# Altium PCB Expansion_hv2.PcbDoc (part 2 of 2)
Units mm, origin at the board's own origin, x right, y up, seen from the top; angles counter-clockwise.
Board outline 43 x 71 mm, 2 copper layers (Top Layer, Bottom Layer); 137 components, 76 nets, 388 pads, 241 vias.
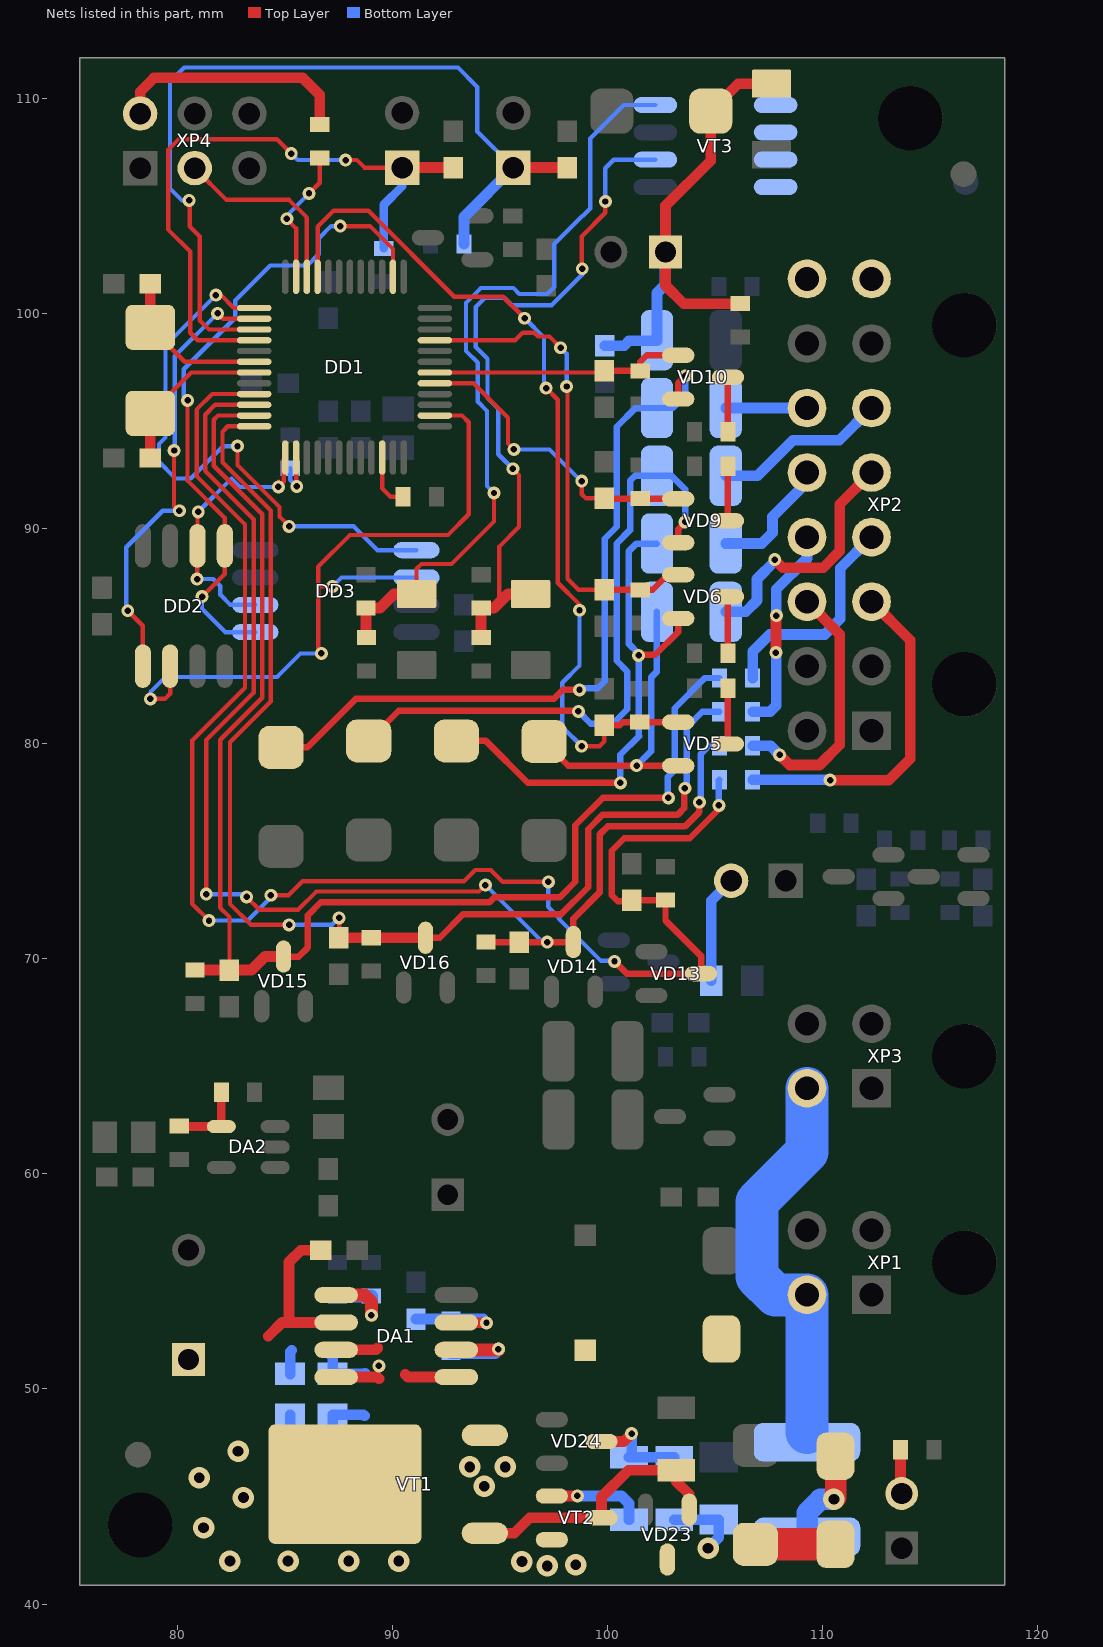
[diagram p2: the nets of this part, all layers, seen from the top]

## Via types
v1: diameter 0.6, hole 0.3, Top Layer to Bottom Layer, 220 vias
v2: diameter 1, hole 0.5, Top Layer to Bottom Layer, 21 vias

## Nets (pads, with @x,y where several pads share a name; then routed paths per layer and width w, separated by ;. In a path a pad name is that pad's centre, name@x,y a point inside that pad or via, vN(x,y) a via of type N, cw(c..) or ccw(c..) an arc to the next point about the centre after c; other vN are vias at no path point) (continued)
INP0_1: FU4.1 XP2.5 | length 11.7
  Top Layer w0.5: v1(107.775,88.55) 108.15,88.175 110.025,88.175 110.8,88.95 110.8,91.125 XP2.5@112.275,92.6
  Bottom Layer w0.5: FU4.1@105.5,86.125 106.425,86.125 106.95,86.65 106.95,87.65 107.775,88.475 v1(107.775,88.55)
INP0_1HF: C4.2 DD1.45 R6.2 VD5.1 | length 41.4
  Top Layer w0.2: DD1.45@86.525,101.7 86.525,104.025 87.275,104.775 88.875,104.775 92.875,100.775 95.15,100.775 v1(96.15,99.775) ; v1(97.15,96.525) 97.69,95.985 97.69,87.474 98.7,86.464 v1(98.7,86.2) ; v1(98.8,79.875) 99.625,79.875 99.85,80.1 C4.2@99.85,80.85
  Top Layer w0.3: C4.2@99.85,80.85 100.575,80.85 100.726,81.001 R6.2@101.5,81.001 ; R6.2@101.5,81.001 VD5.1@103.288,81
  Bottom Layer w0.2: v1(96.15,99.775) 97.05,98.875 97.05,96.625 v1(97.15,96.525) ; v1(98.7,86.2) 98.7,83.625 97.9,82.825 97.9,80.775 v1(98.8,79.875)
INP0_2: FU5.1 XP2.13 | length 5.8
  Bottom Layer w0.5: FU5.1@105.5,89.3 107.175,89.3 107.675,89.8 107.675,90.55 109.275,92.15 XP2.13@109.275,92.6
INP0_2HF: C5.2 DD1.33 R7.2 VD6.1 | length 22.8
  Top Layer w0.2: DD1.33@91.975,98.75 95.706,98.75 96.056,99.1 96.594,99.1 96.769,98.925 97.3,98.925 v1(97.825,98.4) ; v1(98.1,96.6) 98.14,96.56 98.14,87.66 98.65,87.15 C5.2@100.05,87.15
  Top Layer w0.3: C5.2@100.05,87.15 102.1,87.15 102.8,87.85 VD6.1@103.288,87.85
  Bottom Layer w0.2: v1(97.825,98.4) 98.1,98.125 v1(98.1,96.6)
INP0_3: FU6.1 XP2.6 | length 8.1
  Bottom Layer w0.5: FU6.1@105.5,92.45 106.975,92.45 108.625,94.1 110.775,94.1 XP2.6@112.275,95.6
INP0_3F: C6.2 DD1.29 R10.2 VD9.1 | length 14.6
  Top Layer w0.2: DD1.29@91.975,96.75 93.775,96.75 95.375,95.15 95.375,93.95 v1(95.65,93.675) ; v1(98.805,92.204) 98.805,91.595 99,91.4 C6.2@99.848,91.4
  Top Layer w0.3: C6.2@99.848,91.4 99.873,91.375 VD9.1@103.288,91.375
  Bottom Layer w0.2: v1(95.65,93.675) 97.3,93.675 98.771,92.204 v1(98.805,92.204)
INP0_4: FU7.1 XP2.14 | length 3.8
  Bottom Layer w0.5: FU7.1@105.5,95.6 XP2.14@109.275,95.6
INP0_4F: C7.2 DD1.30 R11.2 VD10.1 | length 11.9
  Top Layer w0.2: DD1.30@91.975,97.25 99.775,97.25 C7.2@99.85,97.325
  Top Layer w0.3: C7.2@99.85,97.325 R11.2@101.525,97.324 101.524,97.749 101.825,98.05 VD10.1@103.288,98.05
INP1_1: R12.1 XP2.3 | length 15.8
  Top Layer w0.5: v1(110.35,78.3) 113.075,78.3 114.075,79.3 114.075,84.8 XP2.3@112.275,86.6
  Bottom Layer w0.5: R12.1@106.75,78.325 110.325,78.325 v1(110.35,78.3)
INP1_1HF: C8.2 DD1.9 R12.2 R14.2 VD13.3 | length 71.6
  Top Layer w0.2: v1(81.475,71.775) 80.7,72.55 80.7,80.15 83.15,82.6 83.15,90.191 80.9,92.441 80.9,95.525 81.625,96.25 DD1.9@83.575,96.25 ; v1(84.35,72.95) 85.175,72.95 85.825,73.6 93.325,73.6 93.85,74.125 94.575,74.125 95.125,73.575 v1(97.25,73.575)
  Top Layer w0.3: v1(100.325,69.875) 100.891,69.309 VD13.3@104.349,69.309 104.349,70.126 102.696,71.779 R14.2@102.696,72.726 C8.2@101.121,72.725 ; C8.2@101.121,72.725 101.071,72.675 100.475,72.675 100.2,72.95 100.2,75.02 100.78,75.6 103.828,75.6 105.175,76.947 v1(105.175,77.125)
  Bottom Layer w0.2: v1(81.475,71.775) 83.275,71.775 84.35,72.85 v1(84.35,72.95) ; v1(97.25,73.575) 97.25,72.41 97.755,71.905 97.725,71.875 99.7,69.9 100.3,69.9 v1(100.325,69.875)
  Bottom Layer w0.3: v1(105.175,77.125) 105.175,78.299 R12.2@105.201,78.325
INP1_2: R13.1 XP2.11 | length 12.1
  Top Layer w0.5: v1(108,79.475) 108.475,79 109.85,79 110.8,79.95 110.8,85.075 XP2.11@109.275,86.6
  Bottom Layer w0.5: R13.1@106.75,79.9 107.575,79.9 v1(108,79.475)
INP1_2HF: C9.2 DD1.10 R13.2 R15.2 VD14.3 | length 62.7
  Top Layer w0.2: v1(81.35,73) 81.35,80.164 83.55,82.364 83.55,90.427 81.3,92.677 81.3,95.289 81.761,95.75 DD1.10@83.575,95.75 ; v1(83.225,72.875) 83.825,72.275 85.618,72.275 86.468,73.125 94.025,73.125 v1(94.325,73.425)
  Top Layer w0.3: R15.2@94.35,70.774 VD14.3@98.416,70.774 98.416,71.863 99.65,73.097 99.65,75.794 100.006,76.15 103.6,76.15 104.275,76.825 v1(104.275,77.275)
  Bottom Layer w0.2: v1(81.35,73) 83.1,73 v1(83.225,72.875) ; v1(94.325,73.425) 96.975,70.775 v1(97.2,70.775)
  Bottom Layer w0.3: v1(104.275,77.275) 104.325,77.325 104.325,79.5 104.725,79.9 R13.2@105.201,79.9
INP1_3: R16.1 XP2.4 | length 10.3
  Bottom Layer w0.5: R16.1@106.75,83.05 106.75,84.28 107.545,85.075 110.1,85.075 110.825,85.8 110.825,88.15 XP2.4@112.275,89.6
INP1_3F: C10.2 DD1.11 R16.2 R18.2 VD15.3 | length 64.2
  Top Layer w0.2: C10.2@82.425,69.475 82.424,71.939 82,72.364 82,80.177 83.95,82.127 83.95,90.664 81.7,92.914 81.7,95.052 81.898,95.25 DD1.11@83.575,95.25
  Top Layer w0.3: VD15.3@84.941,70.099 85.649,70.099 86.075,70.525 86.075,72.025 86.675,72.625 94.515,72.625 94.74,72.85 97.775,72.85 98.5,73.575 98.5,76.2 99.775,77.475 102.826,77.475 v1(102.83,77.479)
  Top Layer w0.5: R18.2@80.825,69.474 C10.2@82.425,69.475 ; C10.2@82.425,69.475 83.45,69.475 84.074,70.099 VD15.3@84.941,70.099
  Bottom Layer w0.3: v1(102.83,77.479) 102.8,77.509 102.8,78.45 103.125,78.775 103.125,81.65 104.525,83.05 R16.2@105.201,83.05
INP1_4: R17.1 XP2.12 | length 9.7
  Top Layer w0.5: v1(107.83,84.229) 107.83,85.93 v1(107.85,85.95)
  Bottom Layer w0.5: R17.1@106.75,81.475 107.55,81.475 107.85,81.775 107.85,84.209 v1(107.83,84.229) ; v1(107.85,85.95) 107.85,87.175 109.275,88.6 XP2.12@109.275,89.6
INP1_4F: C11.2 DD1.12 R17.2 R19.2 VD16.3 | length 57.6
  Top Layer w0.2: DD1.12@83.575,94.75 82.35,94.75 82.1,94.5 82.1,93.079 84.35,90.829 84.35,81.962 82.45,80.062 82.45,72.55 83.425,71.575 v1(85.2,71.575) ; C11.2@87.5,70.975 87.525,71 v1(87.525,71.9)
  Top Layer w0.3: VD16.3@91.541,70.974 92.199,70.974 93.3,72.075 97.85,72.075 99.1,73.325 99.1,76.022 99.778,76.7 103.274,76.7 103.575,77.001 103.575,77.9 v1(103.6,77.925)
  Top Layer w0.5: C11.2@87.5,70.975 R19.2@89.025,70.974 ; R19.2@89.025,70.974 VD16.3@91.541,70.974
  Bottom Layer w0.2: v1(85.2,71.575) 87.2,71.575 v1(87.525,71.9)
  Bottom Layer w0.3: v1(103.6,77.925) 103.675,78 103.675,80.75 104.4,81.475 R17.2@105.201,81.475
ISP_START: C24.2 DD1.4 J2.1 R31.2 | length 30.4
  Top Layer w0.2: DD1.4@83.575,98.75 80.95,98.75 80.6,99.1 80.6,102.875 79.575,103.9 79.575,107.6 80.075,108.1 84.625,108.1 v1(85.3,107.425) ; v1(87.825,107.125) 88.35,107.125 88.7,106.775 J2.1@90.45,106.775
  Top Layer w0.5: J2.1@90.45,106.775 C24.2@92.825,106.775
  Bottom Layer w0.2: v1(85.3,107.425) 85.6,107.125 v1(87.825,107.125)
  Bottom Layer w0.4: R31.2@89.6,103.024 89.6,105.05 90.45,105.9 J2.1@90.45,106.775
  Bottom Layer w0.5: J2.1@90.45,106.775 J2.1@90.599,106.924
MISO: DD1.26 DD2.2 DD3.2 | length 34.2
  Top Layer w0.2: v1(78.754,82.079) 79.429,82.079 79.67,82.32 DD2.2@79.67,83.6 DD2.2@79.65,83.62 ; v1(86.7,84.19) 86.55,84.34 86.55,87.3 ; v1(87.213,87.3) 86.55,87.3 ; DD1.26@91.975,95.25 93.236,95.25 93.55,94.936 93.55,90.664 92.586,89.7 88.025,89.7 86.55,88.225 86.55,87.3
  Bottom Layer w0.2: v1(78.754,82.079) 78.754,82.404 79.45,83.1 84.644,83.1 85.733,84.19 v1(86.7,84.19) ; v1(87.213,87.3) 87.633,87.72 DD3.2@91.118,87.72
MOSI: DD1.38 DD2.5 DD3.5 | length 30.4
  Top Layer w0.2: v1(80.479,95.955) 80.479,92.225 82.21,90.494 DD2.5@82.21,89.188 82.21,87.885 v1(81.154,86.829) ; v1(87.579,104.055) 88.959,104.055 90.025,102.989 DD1.38@90.025,101.7
  Bottom Layer w0.2: v1(80.479,95.955) 80.3,96.134 80.3,97.4 82.7,99.8 82.7,100.6 84.325,102.225 86.05,102.225 86.575,102.75 86.575,103.476 87.154,104.055 v1(87.579,104.055) ; v1(81.154,86.829) 81.154,86.271 82.245,85.18 DD3.5@83.625,85.18
NetC2_2: C2.2 C3.1 FU1.2 R3.1 VD2.2 VD3.2 | length 23
  Top Layer w0.5: R3.1@106.175,100.45 103.55,100.45 102.7,101.3 C3.1@102.7,102.85 102.7,105 104.8,107.1 VD3.2@104.8,109.4 106.076,110.676 VD2.2@107.625,110.676
  Bottom Layer w0.5: C2.2@99.875,98.5 100.775,98.5 101,98.725 102.3,98.725 FU1.2@102.3,98.75 102.3,100.95 102.675,101.325 102.675,102.825 C3.1@102.7,102.85
NetC25_2: C25.2 R32.2 VD21.2 VD22.2 VD23.3 VT1.3 VT2.2 | length 7.3
  Top Layer w1.5: VD22.2@106.875,42.775 VD21.2@110.6,42.775
  Bottom Layer w0.5: R32.2@103.1,43.925 C25.2@105.175,43.925 105.175,43.1 v2(104.675,42.6)
  other v2: 97.2,41.775 98.525,41.825 96.025,41.975 94.275,45.475 93.6,46.375 95.25,46.375
NetC30_2: C30.2 DA1.3 R37.2 | length 4.9
  Top Layer w0.5: DA1.3@92.975,53.09 92.99,53.075 v1(94.375,53.075)
  Bottom Layer w0.5: C30.2@91.1,53.25 R37.2@92.724,53.25 ; R37.2@92.725,53.249 94.226,53.249 94.175,53.199 94.299,53.075 v1(94.375,53.075)
NetDA1_1: DA1.1 DA1.7 DA1.8 R35.1 R36.1 | length 10
  Top Layer w0.5: DA1.8@87.387,50.55 89.3,50.55 89.375,50.475 ; DA1.7@87.387,51.82 89.244,51.82 89.324,51.9 ; 90.6,50.675 90.725,50.55 DA1.1@92.975,50.55
  Bottom Layer w0.5: R36.1@85.25,50.7 85.25,51.725 85.325,51.8 ; 87.15,51.575 87.225,51.5 R35.1@87.225,50.7 88.7,50.7 88.725,50.725
  other v1: 89.375,51.075
NetDA1_2: DA1.2 L1.2 R37.1 VD25.2 | length 4.2
  Top Layer w0.6: DA1.2@92.975,51.82 v1@94.925,51.82
  Bottom Layer w0.6: R37.1@92.725,51.7 94.775,51.7 v1(94.925,51.85)
NetDA1_5: DA1.5 R38.2 R39.2 | length 4.9
  Top Layer w0.6: DA1.5@87.387,54.36 88.715,54.36 89.025,54.05 v1(89.025,53.425)
  Bottom Layer w0.6: R38.2@87.45,54.326 R39.2@89.025,54.326 v1(89.025,53.425)
NetDA2_4: DA2.4 R40.1 R41.2 | length 3.6
  Top Layer w0.4: R40.1@80.1,62.225 80.125,62.2 DA2.4@82.05,62.2 R41.2@82.051,63.8
NetDD1_14: DD1.14 R28.2 | length 2.5
  Top Layer w0.2: DD1.14@85.525,93.3 85.525,91.984 v1(85.554,91.954)
  Bottom Layer w0.2: R28.2@85.25,92.801 85.25,92.259 v1(85.554,91.954) v1@85.554,91.763
NetDD1_22: DD1.22 R29.2 | length 2.6
  Top Layer w0.2: DD1.22@89.525,93.3 89.525,91.869 89.919,91.475 R29.2@90.501,91.475
NetFU4_2: FU4.2 VD5.2 VD7.2 | length 14.3
  Top Layer w0.3: VD7.2@97.05,80.1 98.175,78.975 v1(101.35,78.975) 103.281,78.975 VD5.2@103.288,78.968
  Bottom Layer w0.3: v1(101.35,78.975) 102.025,79.65 102.025,80.225 102.025,83.075 102.3,83.35 FU4.2@102.3,86.125
NetFU5_2: FU5.2 VD6.2 VD8.2 | length 24.1
  Top Layer w0.3: VD8.2@92.975,80.125 94.35,80.125 96.3,78.175 v1(100.6,78.175) ; v1(101.45,84.1) 101.475,84.125 102.225,84.125 103.288,85.188 VD6.2@103.288,85.818
  Bottom Layer w0.3: v1(100.6,78.175) 100.6,79.475 101.475,80.35 101.45,80.375 v1(101.45,84.1) 101.45,84.18 100.98,84.65 100.98,88.93 101.35,89.3 FU5.2@102.3,89.3
NetFU6_2: FU6.2 VD9.2 VD11.2 | length 29.7
  Top Layer w0.3: VD11.2@88.9,80.125 90.3,81.525 98.625,81.525 v1(98.65,81.5) ; VD9.2@103.288,89.343 103.288,89.963 103.605,90.28 v1(103.605,90.304)
  Bottom Layer w0.3: v1(98.65,81.5) 99.225,80.925 100.25,80.925 100.925,81.6 100.925,83.35 100.425,83.85 100.425,89.3 101.05,89.925 101.05,92.225 101.275,92.45 FU6.2@102.3,92.45 102.975,92.45 103.605,91.82 v1(103.605,90.304)
NetFU7_2: FU7.2 VD10.2 VD12.2 | length 34.3
  Top Layer w0.3: VD12.2@84.825,79.825 86.05,79.825 88.3,82.075 97.5,82.075 97.925,82.5 v1(98.7,82.5) ; VD10.2@103.288,96.018 103.288,96.763 v1(103.625,97.1)
  Bottom Layer w0.3: v1(98.7,82.5) 98.775,82.575 99.55,82.575 99.875,82.9 99.875,89.528 100.425,90.078 100.425,94.725 101.3,95.6 FU7.2@102.3,95.6 103.025,95.6 103.625,96.2 v1(103.625,97.1)
NetFU8_2: FU8.2 VD21.1 | length 4.7
  Top Layer w1: v2(110.525,44.875) 110.6,44.95 VD21.1@110.6,46.875
  Bottom Layer w1: FU8.2@109.275,43.125 109.275,44.25 109.9,44.875 v2(110.525,44.875)
NetJ3_2: J3.2 R46.1 | length 5
  Bottom Layer w0.5: R46.1@104.825,68.975 104.825,72.7 J3.2@105.75,73.625
NetR4_1: R4.1 VD5.3 | length 2.6
  Top Layer w0.3: VD5.3@105.599,79.984 105.6,79.985 R4.1@105.6,82.575
NetR5_1: R5.1 VD6.3 | length 2.6
  Top Layer w0.3: VD6.3@105.599,86.834 105.599,84.201 R5.1@105.6,84.2
NetR8_1: R8.1 VD9.3 | length 2.5
  Top Layer w0.3: VD9.3@105.599,90.359 105.6,90.36 R8.1@105.6,92.9
NetR9_1: R9.1 VD10.3 | length 2.5
  Top Layer w0.3: VD10.3@105.599,97.034 105.6,97.033 R9.1@105.6,94.5
NetR26_2: R26.2 VD20.2 | length 2.1
  Top Layer w0.5: R26.2@113.626,47.175 113.626,45.189 VD20.2@113.675,45.14
NetR27_2: R27.2 XP4.2 | length 11.3
  Top Layer w0.5: XP4.2@78.275,109.29 78.275,110.3 78.925,110.95 85.825,110.95 86.625,110.15 R27.2@86.625,108.774
NetR32_1: R32.1 R33.1 VD24.3 | length 4.8
  Top Layer w0.5: VD24.3@99.724,47.559 100.759,47.559 v1(101.125,47.925)
  Bottom Layer w0.5: v1(101.125,47.925) 101.125,46.95 R33.1@101,46.825 R32.1@103.1,46.825
NetR33_2: R33.2 VT2.1 | length 4.5
  Top Layer w0.5: VT2.1@97.413,45.025 v1(98.6,45.025)
  Bottom Layer w0.5: v1(98.6,45.025) 100.65,45.025 101,44.675 R33.2@101,43.925
NetR34_1: R34.1 VD23.1 VT1.1 VT2.3 | length 12.8
  Top Layer w0.5: VT1.1@94.3,43.295 95.67,43.295 96.384,44.009 VT2.3@99.724,44.009 99.724,44.974 100.975,46.225 R34.1@103.2,46.225 103.2,45.7 103.8,45.1 VD23.1@103.8,44.387
NetR42_2: R42.2 R45.2 VD27.2 VT3.2 | length 32.5
  Top Layer w0.2: 95.1,86.675 94.975,86.8 94.975,89.161 95.89,90.076 95.89,92.485 v1(95.6,92.775) ; v1(98.825,102.075) 98.8,102.1 98.8,103.575 99.9,104.675 v1(99.9,105.2)
  Top Layer w0.5: R45.2@94.125,85.024 R42.2@94.125,86.301 94.726,86.301 95.1,86.675 95.376,86.951 VD27.2@96.425,86.951
  Bottom Layer w0.2: v1(95.6,92.775) 94.925,93.45 94.925,95.575 94.425,96.075 94.425,97.889 93.875,98.439 93.875,100.3 94.3,100.725 95.2,100.725 95.55,100.375 97.4,100.375 98.825,101.8 v1(98.825,102.075) ; v1(99.9,105.2) 99.9,106.75 100.295,107.145 VT3.2@102.225,107.145
NetR43_2: R43.2 R44.2 VD26.2 VT3.4 | length 36.3
  Top Layer w0.2: VD26.2@91.125,86.951 91.125,88.125 91.35,88.35 92.75,88.35 94.725,90.325 v1(94.725,91.65)
  Top Layer w0.5: R44.2@88.8,84.924 88.775,84.949 R43.2@88.775,86.301 89.426,86.301 90.076,86.951 VD26.2@91.125,86.951
  Bottom Layer w0.2: v1(94.725,91.65) 94.4,91.975 94.4,95.464 93.975,95.889 93.975,97.702 93.425,98.252 93.425,100.486 94.114,101.175 95.625,101.175 95.9,100.9 97.2,100.9 97.525,101.225 97.525,103.225 98.825,104.525 98.85,104.525 99.2,104.875 99.2,108.125 100.76,109.685 VT3.4@102.225,109.685
PWM_CH1: VT3.5 VT3.6 XP2.8
PWM_CH2: VT3.7 VT3.8 XP2.16
RESET: C20.2 DD1.3 J1.1 R30.2 | length 40.9
  Top Layer w0.2: v1(80.55,105.25) 80.575,105.225 80.575,104.05 81.05,103.575 81.05,99.675 81.475,99.25 DD1.3@83.575,99.25
  Top Layer w0.5: J1.1@95.625,106.775 C20.2@98.125,106.775
  Bottom Layer w0.2: v1(80.55,105.25) 80.225,105.25 79.665,105.81 79.665,110.765 80.325,111.425 93.05,111.425 93.95,110.525 93.95,108.45 J1.1@95.625,106.775
  Bottom Layer w0.5: R30.2@93.324,103.225 93.324,104.474 J1.1@95.625,106.775
RXD0: DD1.46 XP4.3 | length 8.9
  Top Layer w0.2: XP4.3@80.815,106.75 82.29,105.275 85.2,105.275 86.025,104.45 DD1.46@86.025,101.7
SCK: DD1.13 DD2.6 DD3.6 | length 12.9
  Top Layer w0.2: v1(80.925,87.65) 80.925,89.36 80.94,89.375 80.94,90.74 v1(80.975,90.775) ; v1@84.704,92.179 v1(84.704,91.929) 84.954,92.18 84.954,93.229 DD1.13@85.025,93.3
  Bottom Layer w0.2: v1(80.925,87.65) 81.675,87.65 82,87.325 82,86.925 82.475,86.45 DD3.6@83.625,86.45 ; v1(80.975,90.775) 82.525,92.325 82.921,91.929 v1(84.704,91.929)
SS0: DD1.2 DD2.1 | length 20.9
  Top Layer w0.2: v1(77.7,86.175) 78.4,85.475 DD2.1@78.4,83.6 ; v1(79.85,93.625) 79.85,91.025 v1@80.05,90.825 ; v1(81.875,100) 82.125,99.75 DD1.2@83.575,99.75
  Bottom Layer w0.2: v1(77.7,86.175) 77.625,86.25 77.625,89.125 79.325,90.825 v1(80.1,90.825) ; v1(79.85,93.625) 79.879,93.654 79.879,98.004 v1(81.875,100)
SS1: DD1.1 DD3.1 | length 26.6
  Top Layer w0.2: v1(81.8,100.85) 81.825,100.825 82.05,100.825 82.625,100.25 DD1.1@83.575,100.25 ; v1(82.8,93.825) 82.8,92.945 84.75,90.995 84.75,90.55 v1(85.2,90.1)
  Bottom Layer w0.2: v1(81.8,100.85) 79.45,98.5 79.45,94.225 79.15,93.925 79.15,93.1 79.925,92.325 80.625,92.325 82.125,93.825 v1(82.8,93.825) ; v1(85.2,90.1) 88.2,90.1 89.31,88.99 DD3.1@91.118,88.99
TXD0: DD1.47 R27.1 | length 6.3
  Top Layer w0.2: v1(85.1,104.4) 85.1,104.375 85.525,103.95 DD1.47@85.525,101.7 ; v1(86.125,105.575) 86.625,106.075 R27.1@86.625,107.225
  Bottom Layer w0.2: v1(85.1,104.4) 85.1,104.55 v1(86.125,105.575)
VIN: FU8.1 XP1.3 XP3.3 | length 18.8
  Bottom Layer w2: FU8.1@109.275,47.975 XP1.3@109.275,54.375 107.8,54.375 106.95,55.225 106.95,58.7 109.275,61.025 XP3.3@109.275,63.975
VIN_F: C26.2 C27.2 DA1.6 R35.2 R36.2 VT1.2 | length 12
  Top Layer w0.5: 84.225,52.45 84.865,53.09 85.2,53.09 ; C26.2@86.675,56.45 85.75,56.45 85.2,55.9 85.2,53.09 ; DA1.6@87.387,53.09 85.2,53.09
  Bottom Layer w0.5: R36.2@85.25,48.8 85.25,47.75 85.325,47.675 ; 87.15,47.425 87.225,47.5 R35.2@87.225,48.8 88.65,48.8 88.7,48.75
  other v2: 82.45,42 85.15,42 87.975,42 90.3,42 81.225,43.55 83.075,44.95 81.025,45.875 82.825,47.1
XTALIN: C22.2 DD1.6 QR1.1 | length 7.5
  Top Layer w0.2: QR1.1@78.75,99.35 80.35,97.75 DD1.6@83.575,97.75
  Top Layer w0.5: QR1.1@78.75,99.35 C22.2@78.75,101.375
XTALOUT: C23.2 DD1.7 QR1.2 | length 7.7
  Top Layer w0.2: QR1.2@78.75,95.35 80.65,97.25 DD1.7@83.575,97.25
  Top Layer w0.5: C23.2@78.75,93.275 QR1.2@78.75,95.35
pads on no net: DD1.15 DD1.16 DD1.23 DD1.24 DD1.36 DD1.37 DD1.39 DD1.40 DD1.42 DD1.43 DD1.48 REP1.1 REP2.1 REP3.1 REP4.1 VD23.2 VD24.2 XP1.5 XP2.17 XP2.18 XP3.5 XP4.1 XP4.4 XP4.6

## Polygon pours and split planes (outlines as drawn)
GND on Top Layer "GND_L01_P044" (hatched 90Degree grid 0.15 track 0.2, remove dead copper, pour order 44): 75.475,111.875 118.475,111.875 118.475,40.875 75.475,40.875
+3V3 on Top Layer "+3V3_L01_P042" (hatched 90Degree grid 0.15 track 0.2, remove dead copper, pour order 42): 75.475,86.4 75.475,88.75 77.3,90.575 78.625,90.575 79.775,90.575 80.075,90.275 80.275,90.075 80.275,88.9 80.275,88 79.9,87.625 79.475,87.2 78.45,87.2 77.875,87.2 77.55,86.875 77.075,86.4 76.575,86.4
NetC25_2 on Top Layer "NETC25_2_L01_P014" (hatched 90Degree grid 0.15 track 0.2, remove dead copper, pour order 14): 110.75,44.05 105.5,44.05 105.15,43.7 104.675,43.225 103.225,43.225 99.125,43.225 98.775,43.575 98.6,43.75 96.775,43.75 96.325,43.75 95.95,43.375 95.4,42.825 95.4,41.65 95.4,40.875 111.9,40.875 111.9,43.675 111.525,44.05
NetC25_2 on Top Layer "NETC25_2_L01_P018" (hatched 90Degree grid 0.15 track 0.2, remove dead copper, pour order 18): 92.85,49.225 92.85,46.05 93.325,45.575 94,44.9 95.1,44.9 95.875,44.9 96.1,45.125 96.1,46.2 96.1,48.675 95.55,49.225
VIN_F on Top Layer "VIN_F_L01_P020" (hatched 90Degree grid 0.15 track 0.2, remove dead copper, pour order 20): 91.525,49.2 84.475,49.2 84.475,49.375 84.475,49.525 84.475,50.25 84.475,52.8 81.65,52.8 81.475,52.975 80.375,52.975 75.475,52.975 75.475,40.875 91.525,40.875
NetDA1_1 on Top Layer "NETDA1_1_L01_P028" (hatched 90Degree grid 0.15 track 0.2, remove dead copper, pour order 28): 88.7,52.4 86.125,52.4 86.075,52.4 85.625,51.95 85.425,51.75 85.425,50.775 85.425,50.025 85.75,49.7 85.825,49.625 88,49.625 89.425,49.625 90.95,49.625 91.45,50.125 91.65,50.325 91.65,51 91.65,51.175 91.45,51.375 91.125,51.7 90.425,51.7 90.1,51.7 89.85,51.95 89.4,52.4 89.275,52.4
NetDA1_2 on Top Layer "NETDA1_2_L01_P030" (hatched 90Degree grid 0.15 track 0.2, remove dead copper, pour order 30): 95.4,53.25 103.775,53.25 104.175,53.65 104.4,53.875 105.85,53.875 106.4,53.875 106.675,53.6 106.675,51.5 106.675,50.75 106.45,50.525 106.2,50.275 103.875,50.275 102.05,50.275 101.55,49.775 101.275,49.5 97.4,49.5 95.55,49.5 95.2,49.85 94.525,50.525 94.525,51.35 94.525,52.2 94.725,52.4 94.975,52.65 94.975,53.075 94.975,53.175 95.05,53.25
+5V on Top Layer "+5V_L01_P032" (hatched 90Degree grid 0.15 track 0.2, remove dead copper, pour order 32): 96.75,55.8 101.375,55.8 102.425,55.8 103.025,56.4 103.575,56.95 103.575,59.125 103.575,59.475 103.325,59.725 103.1,59.95 102.15,59.95 94.55,59.95 94.225,60.275 94.05,60.45 92.6,60.45 91.725,60.45 91.05,59.775 90.6,59.325 90.6,58.35 90.6,57.425 91,57.025 93.15,57.025 94.35,57.025 95.575,55.8 95.9,55.8
+5V on Top Layer "+5V_L01_P034" (hatched 90Degree grid 0.15 track 0.2, remove dead copper, pour order 34): 90.6,57.425 88.475,59.55 88.425,59.6 86.6,59.6 86.05,59.6 85.925,59.725 85.65,60 85.65,60.65 85.65,62.5 85.875,62.725 86.15,63 87.125,63 88.3,63 88.575,62.725 89.225,62.075 89.225,61.2 89.225,61.05 89.625,60.65 89.825,60.45 91.725,60.45
+3V3 on Top Layer "+3V3_L01_P036" (hatched 90Degree grid 0.15 track 0.2, remove dead copper, pour order 36): 81.875,61.075 81.325,61.075 81.075,61.325 80.975,61.425 80.225,61.425 79.475,61.425 79.35,61.55 79.325,61.575 79.325,62.325 79.325,62.475 79.175,62.625 79.15,62.65 78.375,62.65 77.9,62.65 77.7,62.45 77.525,62.275 77.525,60.725 77.525,58.775 77.925,58.375 78.025,58.275 79.575,58.275 81.7,58.275 82.675,59.25 83,59.575 83,60.35 83,60.775 82.7,61.075
GND on Bottom Layer "GND_L02_P046" (hatched 90Degree grid 0.15 track 0.2, remove dead copper, pour order 46): 75.475,111.875 118.475,111.875 118.475,40.875 75.475,40.875
NetC25_2 on Bottom Layer "NETC25_2_L02_P016" (hatched 90Degree grid 0.15 track 0.2, remove dead copper, pour order 16): 99.15,40.875 95.4,40.875 94.875,40.875 94.225,41.525 93.95,41.8 93.95,44.5 93.95,44.95 93.625,45.275 93.1,45.8 93.1,47.425 93.1,48.5 93.475,48.875 93.625,49.025 95.475,49.025 95.65,49.025 95.925,48.75 96.05,48.625 96.05,47.425 96.05,44.15 96.525,43.675 97,43.2 98.025,43.2 98.85,43.2 99.3,42.75 99.675,42.375 99.675,40.875
VIN_F on Bottom Layer "VIN_F_L02_P022" (hatched 90Degree grid 0.15 track 0.2, remove dead copper, pour order 22): 91.525,49.225 86.95,49.225 75.475,49.225 75.475,40.875 91.525,40.875
VIN_F on Bottom Layer "VIN_F_L02_P024" (hatched 90Degree grid 0.15 track 0.2, remove dead copper, pour order 24): 75.475,53.075 80.3,53.075 81.325,53.075 81.75,53.5 82.075,53.825 82.825,53.825 84.025,53.825 84.025,51.45 84.025,49.25 84,49.225 75.475,49.225
NetDA1_1 on Bottom Layer "NETDA1_1_L02_P026" (hatched 90Degree grid 0.15 track 0.2, remove dead copper, pour order 26): 84.5,54 85.925,54 86.15,53.775 86.35,53.575 86.35,53.075 86.35,52.65 86.6,52.4 86.7,52.3 88.125,52.3 89.275,52.3 89.6,51.975 89.725,51.85 89.725,50.9 89.725,50.275 89.225,49.775 89.025,49.575 87.925,49.575 84.9,49.575 84.5,49.975
PWM_CH1 on Bottom Layer "PWM_CH1_L02_P038" (hatched 90Degree grid 0.15 track 0.2, remove dead copper, pour order 38): 111,101.625 111,102.7 111,106.625 110.05,107.575 109.825,107.8 108.6,107.8 106.525,107.8 106.2,108.125 105.85,108.475 105.85,109.625 105.85,110.5 106.25,110.9 106.625,111.275 108.325,111.275 110.075,111.275 110.375,110.975 112.2,109.15 112.2,108.4 112.2,108.25 112.9,107.55 114.725,105.725 114.725,101.95 114.725,100.925 114.325,100.525 113.975,100.175 112.9,100.175 111.4,100.175 111,100.575
PWM_CH2 on Bottom Layer "PWM_CH2_L02_P040" (hatched 90Degree grid 0.15 track 0.2, remove dead copper, pour order 40): 105.75,107.625 105.75,105.725 105.75,105.275 106.15,104.875 106.45,104.575 107.425,104.575 107.7,104.575 107.85,104.425 108,104.275 108,102.95 108,101 108.325,100.675 108.875,100.125 110,100.125 110.175,100.125 110.4,100.35 110.65,100.6 110.65,101.325 110.65,106.475 110.075,107.05 109.65,107.475 108.85,107.475 108.625,107.475 108.475,107.625 107.825,107.625

## Keep-outs
Keep-Out Layer:
  the board outline again, w0.2

## Other copper
Top Layer:
  pour cut-out: 98.613,67 100.038,67 100.038,61.125 98.613,61.125
  pour cut-out: 95.087,55.625 95.087,53.375 102.962,53.375 102.962,55.625

## Silkscreen, mask and mechanical layers (free items; w line width, h text height)
Top Overlay:
  lines w0.2: 81.975,48.475 83.375,48.475 ; 82.65,47.875 82.65,49.05
  text "R" at 96.6,104.325 h0.8
  text "ISP" at 89.425,104.25 h0.8
  text "PROG" at 78.65,103.425 h1
  text "hv2" at 80.225,75.9 h1 r90
  text "EX02" at 78.45,71.475 h2 r90
  text "120E" at 105.35,70.825 h1
Mechanical 1:
  circle w0.002: c78.281,43.673 r1.5
  circle w0.002: c114.081,109.073 r1.5
  lines w0.002: 105.881,43.873 125.081,43.873 ; 107.481,77.074 ccw(c108.481,77.074) 108.481,76.074 ; 107.481,105.071 cw(c108.481,105.071) 108.481,106.071 ; 108.181,77.074 ccw(c108.481,77.074) 108.481,76.774 118.481,76.774 118.481,76.074 ; 108.181,77.273 120.681,77.273 120.681,90.323 ; 108.181,105.071 cw(c108.481,105.071) 108.481,105.371 ; 108.481,71.471 ccw(c108.481,70.471) 107.481,70.471 107.481,50.874 ccw(c108.481,50.874) 108.481,49.874 118.481,49.874 118.481,50.574 108.481,50.574 cw(c108.481,50.874) 108.181,50.874 108.181,70.471 cw(c108.481,70.471) 108.481,70.771 118.481,70.771 118.481,71.471 ; 118.481,105.371 118.481,106.071 ; 108.181,55.123 108.181,56.623 ; 108.181,55.123 120.681,55.123 ; 108.181,55.123 108.181,51.073 120.681,51.073 120.681,55.123 ; 108.181,56.623 120.681,56.623 ; 108.181,56.623 108.181,60.673 ; 108.181,60.673 120.681,60.673 ; 108.181,60.673 108.181,64.723 ; 108.181,64.723 120.681,64.723 ; 108.181,64.723 108.181,66.223 ; 108.181,66.223 120.681,66.223 ; 108.181,66.223 108.181,70.273 120.681,70.273 120.681,66.223 ; 108.181,91.823 108.181,90.323 120.681,90.323 ; 108.181,91.823 120.681,91.823 ; 108.181,91.823 108.181,104.873 120.681,104.873 120.681,91.823 ; 120.681,55.123 120.681,56.623 ; 120.681,56.623 120.681,60.673 ; 120.681,60.673 120.681,64.723 ; 120.681,64.723 120.681,66.223 ; 120.681,90.323 120.681,91.823 ; 75.481,40.873 75.481,111.873 118.481,111.873 118.481,104.873 118.481,77.273 118.481,70.273 118.481,51.073 118.481,45.373 118.481,42.373 118.481,40.873 75.481,40.873 ; 115.481,42.373 120.681,42.373 ccw(c120.681,43.873) 120.681,45.373 115.481,45.373 115.481,42.373
  lines w0.1: 107.481,77.074 107.481,105.071 ; 108.181,77.074 108.181,105.071 ; 108.181,77.273 108.181,90.323 ; 108.481,71.471 118.481,71.471 ; 108.481,76.074 118.481,76.074
  lines w0.2: 108.481,105.371 118.481,105.371 ; 108.481,106.071 118.481,106.071
Mechanical 2:
  lines w0.1: 113.107,39.384 113.682,39.959 113.682,39.984 ; 113.682,37.034 113.682,39.984 ; 114.282,39.384 113.682,39.984 ; 140.982,56.109 140.632,56.459 ; 141.082,56.934 140.607,56.459 ; 143.207,56.459 140.607,56.459 ; 113.682,39.984 113.682,39.984 ; 140.607,56.459 140.607,56.459 ; 140.607,56.459 140.632,56.459 ; 140.632,56.459 140.632,56.459 ; 138.807,55.834 139.557,55.834 ccw(c139.584,56.259) 139.557,56.684 138.807,56.684 138.807,55.834
  lines w0.2: 137.432,51.759 137.432,52.934 137.432,56.234 138.782,56.234 ; 128.482,52.759 128.482,54.034 138.782,54.034 138.782,52.759 128.482,52.759
  text "Монтаж VD20" at 126.332,65.459 h3
  text "Монтаж производить" at 124.557,63.559 h2
  text "в сторону края платы B" at 123.957,61.359 h2
  text "A" at 133.557,57.134 h1.52
  text "B" at 141.807,57.109 h1.52
  text "B" at 119.182,44.059 h1.52
  text "A" at 114.907,37.309 h1.52
  text "TOP" at 90.332,33.209 h5
Mechanical 3:
  text "BOT" at 103.557,33.309 h5

## Dimensions
137.432,56.234 to 138.782,54.034 on Mechanical 2
138.782,54.034 to 140.01,56.259 on Mechanical 2